# Altium PCB PCB1.PcbDoc
Units mm, origin at the board's own origin, x right, y up, seen from the top; angles counter-clockwise.
Board outline 152.4 x 101.6 mm, 2 copper layers (Top Layer, Bottom Layer); 41 components, 27 nets, 113 pads, 0 vias.
Unrouted connection lines stored in the file: 1.
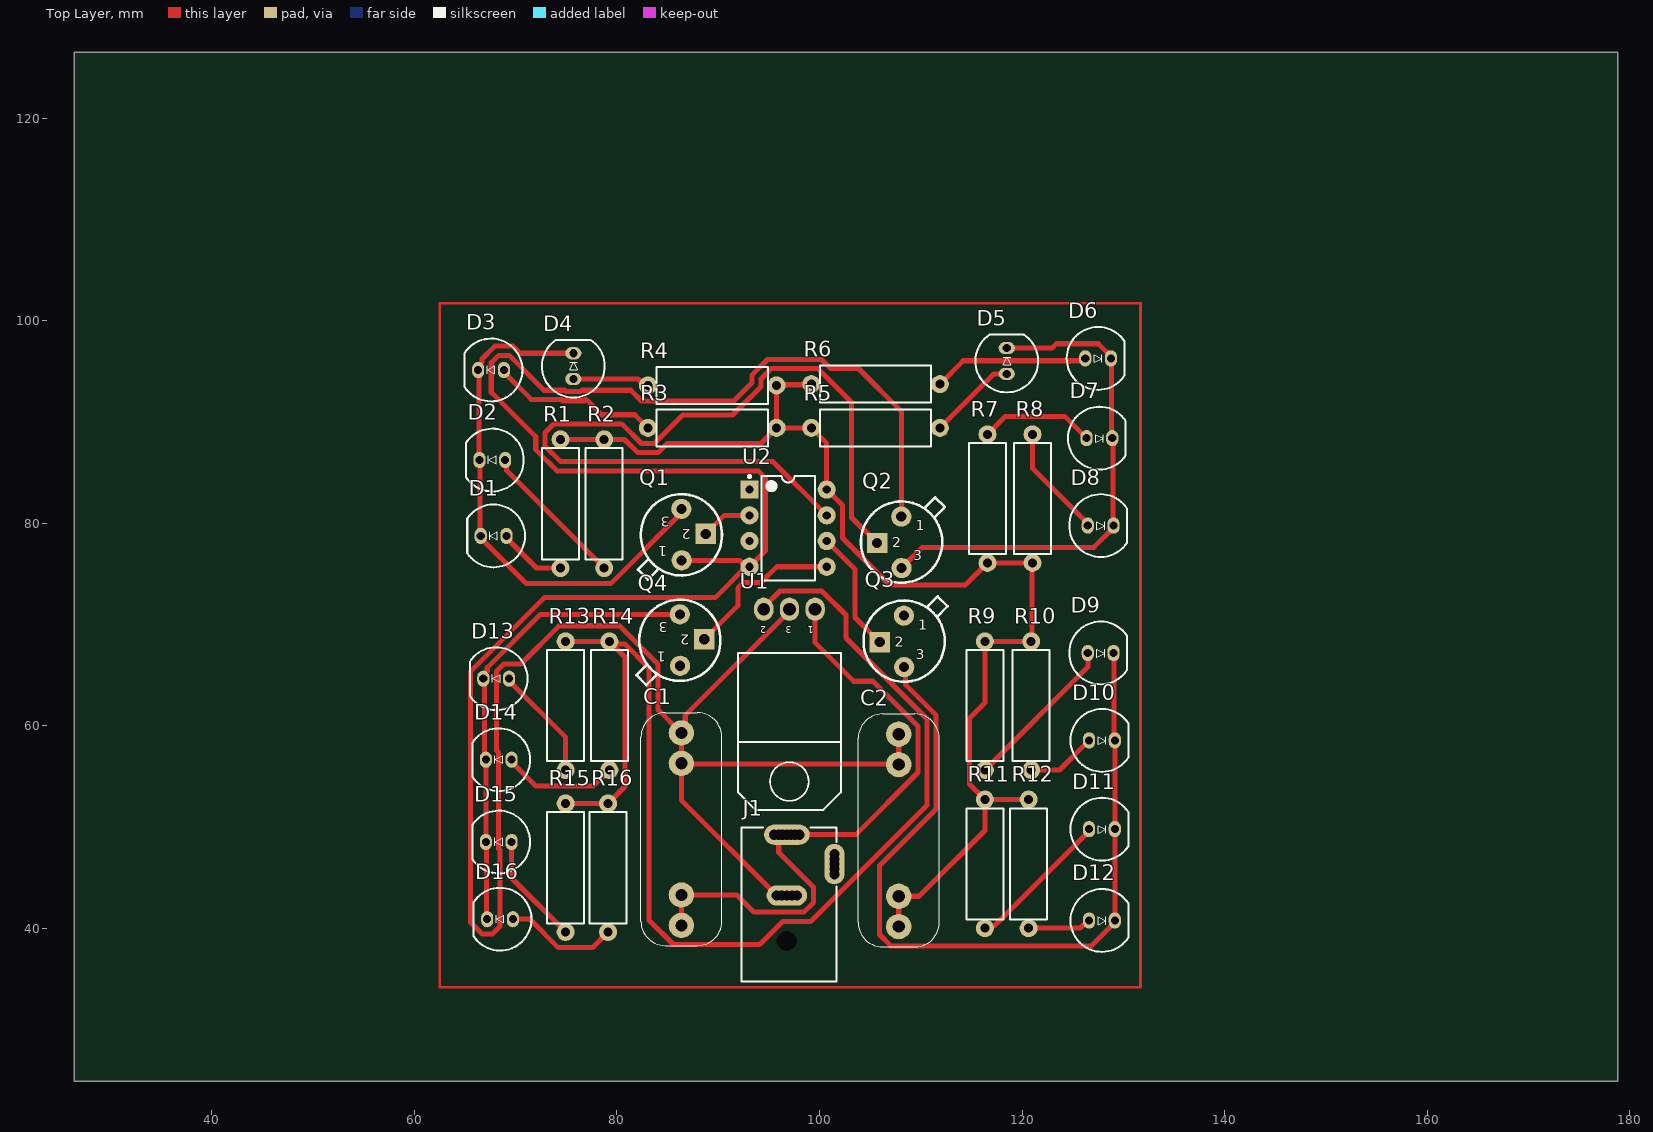
[diagram p0: Top Layer view]
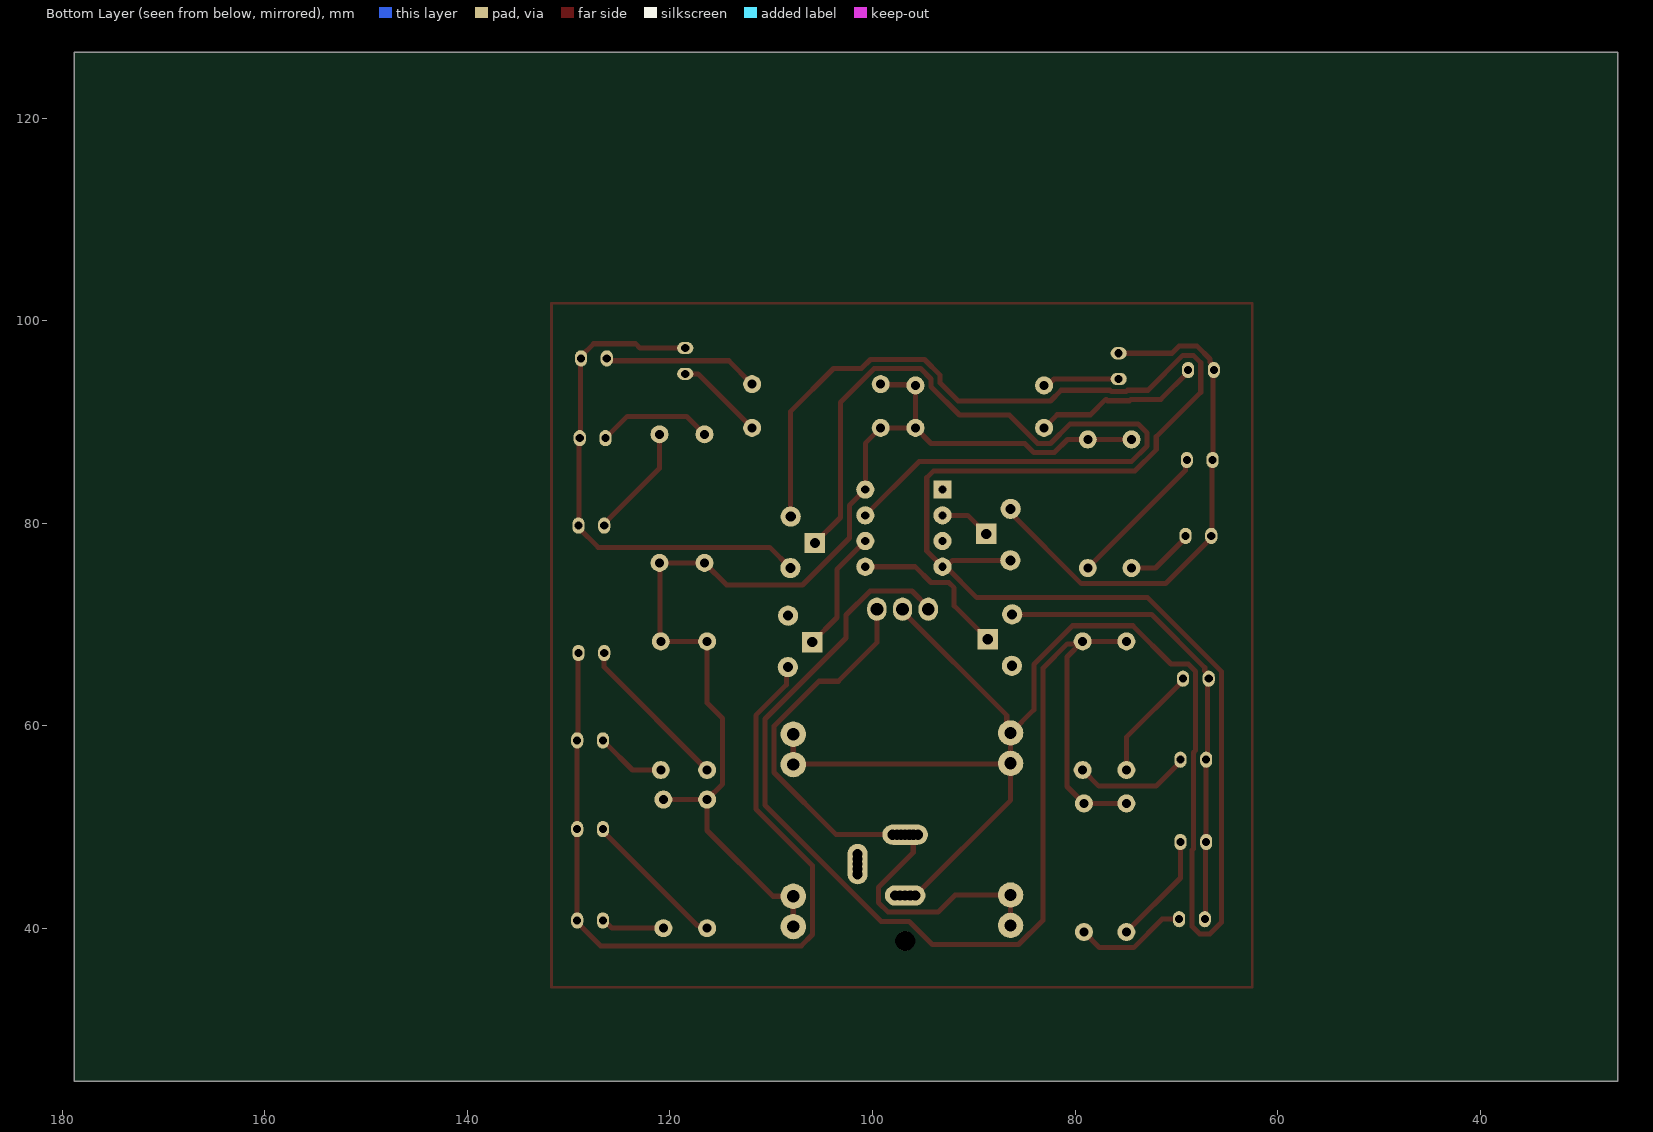
[diagram p1: Bottom Layer view, seen from below]
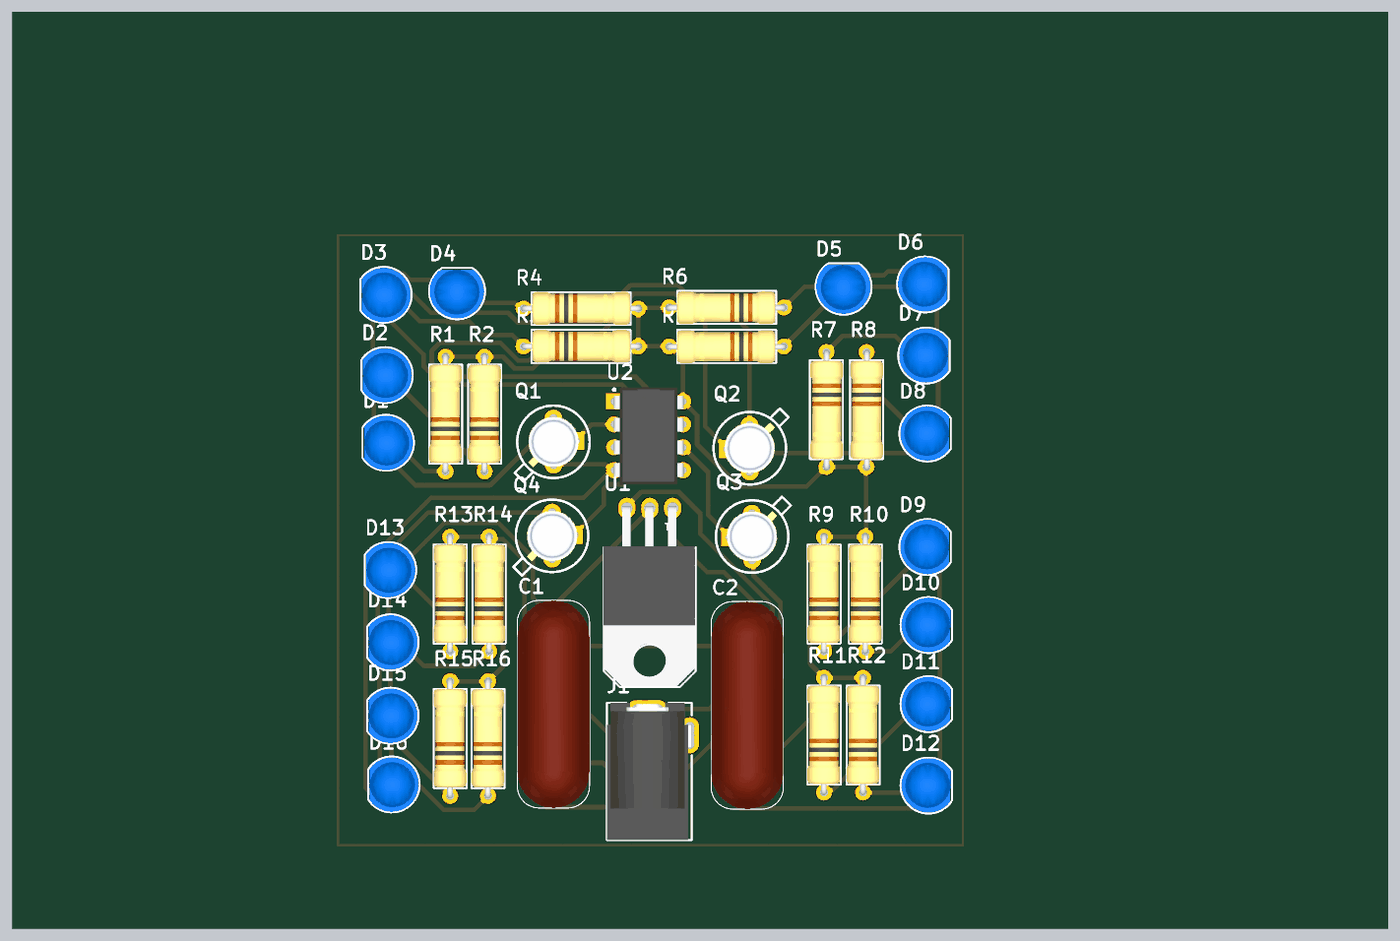
[diagram p2: 3D render of the assembled board from above, using the file's embedded part models]

## Layer stack, top to bottom
Top Solder: solder mask 0.0102, Solder Resist, Dk 3.5
Top Layer: signal copper 0.0356
Dielectric 1: dielectric 0.32, FR-4, Dk 4.8
Bottom Layer: signal copper 0.0356
Bottom Solder: solder mask 0.0102, Solder Resist, Dk 3.5

## Board outline
26.416,24.892 178.816,24.892 178.816,126.492 26.416,126.492

## Design rules (kind name [scope] priority, off if disabled: settings)
Clearance [All] p1: gap=0.4 ignorepadtopadclearanceinfootprint=FALSE
PolygonConnect [All] p1: connectstyle=Relief reliefconductorwidth=0.254 reliefentries=4 polygonreliefangle="90 Angle" airgapwidth=0.254
RoutingVias [All] p1: holewidth=0.711 width=1.27 viastyle="Through Hole" minholewidth=0.711 minwidth=1.27 maxholewidth=0.711 maxwidth=1.27
SolderMaskExpansion [All] p1: expansion=0.102 istentingtop=FALSE
SupplyNets "Schematic Supply Nets" [InNet('GND')] p1: voltage=0.000
Width [All] p1: maxlimit=1 minlimit=0.5 preferedwidth=0.7
30 further rules are at their usual default settings.

## Components (designator, comment, footprint, x,y, rotation, side; value= is the part's Value field where it differs from the comment)
C1 "" CBB22 86.36,49.784 r270 top
C2 "" CBB22 107.823,49.657 r270 top
D1 "LED 5MM" LED5MM_BLUE 67.818,78.74 r180 top
D2 "LED 5MM" LED5MM_BLUE 67.691,86.233 r180 top
D3 "LED 5MM" LED5MM_BLUE 67.564,95.123 r180 top
D4 "LED 5MM" LED5MM_BLUE 75.692,95.504 r90 top
D5 "LED 5MM" LED5MM_BLUE 118.491,96.012 r90 top
D6 "LED 5MM" LED5MM_BLUE 127.508,96.266 r0 top
D7 "LED 5MM" LED5MM_BLUE 127.635,88.392 r0 top
D8 "LED 5MM" LED5MM_BLUE 127.762,79.756 r0 top
D9 "LED 5MM" LED5MM_BLUE 127.762,67.183 r0 top
D10 "LED 5MM" LED5MM_BLUE 127.889,58.547 r0 top
D11 "LED 5MM" LED5MM_BLUE 127.889,49.784 r0 top
D12 "LED 5MM" LED5MM_BLUE 127.889,40.767 r0 top
D13 "LED 5MM" LED5MM_BLUE 68.072,64.643 r180 top
D14 "LED 5MM" LED5MM_BLUE 68.326,56.642 r180 top
D15 "LED 5MM" LED5MM_BLUE 68.326,48.514 r180 top
D16 "LED 5MM" LED5MM_BLUE 68.453,40.894 r180 top
J1 "Power Jack" "Power Jack" 96.774,34.735 r90 top
Q1 "2N2222" 2N2222 86.385,76.327 r180 top
Q2 "2N2222" 2N2222 108.077,80.645 r0 top
Q3 "2N2222" 2N2222 108.331,70.866 r0 top
Q4 "2N2222" 2N2222 86.233,65.913 r180 top
R1 "1K" RES-(1/1) 74.422,75.565 r90 top
R2 "1K" RES-(1/1) 78.74,75.565 r90 top
R3 "1K" RES-(1/1) 83.058,89.408 r0 top
R4 "1K" RES-(1/1) 83.058,93.599 r0 top
R5 "1K" RES-(1/1) 111.887,89.408 r180 top
R6 "1K" RES-(1/1) 111.887,93.726 r180 top
R7 "1K" RES-(1/1) 116.586,88.773 r270 top
R8 "1K" RES-(1/1) 121.031,88.773 r270 top
R9 "1K" RES-(1/1) 116.332,55.626 r90 top
R10 "1K" RES-(1/1) 120.904,55.626 r90 top
R11 "1K" RES-(1/1) 116.332,40.005 r90 top
R12 "1K" RES-(1/1) 120.65,40.005 r90 top
R13 "1K" RES-(1/1) 74.93,55.626 r90 top
R14 "1K" RES-(1/1) 79.248,55.626 r90 top
R15 "1K" RES-(1/1) 74.93,39.624 r90 top
R16 "1K" RES-(1/1) 79.121,39.624 r90 top
U1 "L78XXCV" "78XXCV - Right" 97.028,71.501 r180 top
U2 "ATtiny13-20PU" 8P3 96.901,79.502 r0 top

## Footprints (in the part's own frame and the unit in brackets; to place one, negate y for a bottom-side part, rotate by r counter-clockwise, add the part's x,y. Pads: shape width x height; smd on the part's side, far side on the other; paste and mask are expansions set on the pad)
2N2222 [mm] "NPN Transistor"
  round 2 hole 1: 1(0,0) 3(0.025,-5.08)
  rect 2x2 hole 1: 2(-2.388,-2.616)
  silkscreen extent -3.99,-6.53 4.31,1.89, body extent -2.79,-5.3 2.81,0.3, height 6.6
8P3 [mm] "DIP, 8-Leads, Row Spacing 7.62mm, Pitch 2.54mm, Body 9.59x6.61mm"
  rect 1.8x1.8 hole 0.8: 1(-3.81,3.81)
  round 1.8 hole 0.8: 2(-3.81,1.27) 3(-3.81,-1.27) 4(-3.81,-3.81) 5(3.81,-3.81) 6(3.81,-1.27) 7(3.81,1.27) 8(3.81,3.81)
  silkscreen extent -3.93,-5.15 2.65,5.23, body extent -3.88,-5.4 3.88,5.4, height 4.5
"78XXCV - Right" [mil] "Right Angle"
  oval 75x90 hole 50: 1(-100,0) 2(100,0) 3(0,0)
  silkscreen extent -201,170 200,780, body extent -198,-8 202,776, height 175
CBB22 [mm] "W23_0_H14_5_T8_0_P19"
  round 2.5 hole 1.2: 1(-9.5,0) 1(-6.5,0) 2(6.5,0) 2(9.5,0)
  silkscreen extent -11.5,-4 11.5,4, body extent -11.5,-4 11.5,4, height 19.5
LED5MM_BLUE [mm] "LED 5MM THROUGH HOLE BLUE-Designer Abbas Basereh"
  oval 1.2x1.6 hole 0.8: 1(-1.27,0) 2(1.27,0)
  silkscreen extent -3.1,-3.1 2.6,3.1, body extent -2.99,-2.98 2.43,3.04, height 12.31
"Power Jack" [mm] "Power Adaptor Jack"
  round 1.5 hole 1: 1(14.5,-1.25) 1(14.5,-0.8) 1(14.5,-0.4) 1(14.5,0.4) 1(14.5,0.8) 1(14.5,1.25) 2(8.5,-1) 2(8.5,1) 2(8.5,-0.5) 2(8.5,0.5) 3(10.6,-4.7) 3(11.1,-4.7) 3(12.1,-4.7) 3(12.6,-4.7)
  oval 2x4.5 hole 1: 1(14.5,0)
  oval 2x4 hole 1: 2(8.5,0)
  oval 4x2 hole 1: 3(11.6,-4.7)
  round 1.9 hole 2: MH(4,0)
  silkscreen extent 0,-4.9 15.2,4.5, body extent 0,-4.9 15.2,4.5, height 11
RES-(1/1) [mil]
  round 70 hole 35: 1(0,0) 2(500,0)
  silkscreen extent 34,-72 466,72, body extent -11,-71 514,73, height 151

## Part data
C1 C2: library part "Cap CBB22 105J400V", "Polypropylene film with epoxy Cap CBB22 105J400V", Manufacturer=CHINA, Data=16-12-2016, Designer="Abbas Basereh", Link=https://www.alibaba.com/product-detail/CBB22-capacitors-105J-400V-1UF-400V_60020643516.html, Part. No=105J400V
D1 D2 D3 D4 D5 D6 D7 D8 D9 D10 D11 D12 D13 D14 D15 D16: "Light Emitting Diode", Data=16-12-2016, Designer="Abbas Basereh"
Q1 Q2 Q3 Q4: "NPN Transistor"
R1 R2 R3 R4 R5 R6 R7 R8 R9 R10 R11 R12 R13 R14 R15 R16: library part "RES DIP PACKAGE", "TOTAL DIP RESISTOR PACK", Designer="Ali Hafizi"
U1: "Fixed Voltage Regulator", Adding Date=1387/01/06, Company=ControTec, Designer="Saeid Jorablo"
U2: "8-bit AVR Microcontroller, 2.7-5.5V, 1KB Flash, 64 Bytes EEPROM, 64 Bytes SRAM, 8-pin PDIP, Industrial Grade (-40°C to 85°C), Pb-Free", Supplier Part Number 1=ATTINY13-20PU-ND, Code_JEDEC=MS-001-BA, ComponentAvailability="Not recommended for new design.", ComponentLink1Description="Manufacturer Link", ComponentLink1URL=http://www.atmel.com/products/avr/default.asp?, ComponentLink2Description="ATtiny13  Datasheet", ComponentLink2URL=http://www.atmel.com/dyn/resources/prod_documents/doc2535.pdf, ComponentLink3Description="ATtiny13 Summary", ComponentLink3URL=http://www.atmel.com/dyn/resources/prod_documents/2535S.pdf, ComponentLink4Description="Atmel.com Home", ComponentLink4URL=http://www.atmel.com, DatasheetVersion="revI, May-2008", PackageDescription="8-Lead, 0.300\" Wide Body, Plastic Dual In-Line Package (PDIP)", PackageReference=8P3, PackageVersion="revB, Jan-2002", Published=2017-1-6, Publisher="Abbas Basereh", Supplier 1=Digi-Key, Supplier 2=Farnell, Supplier 3=Mouser, Supplier Part Number 2=9171550, Supplier Part Number 3=556-ATTINY13-20PU
J1: Adding Date=10/21/2009, Company=Personal, Designer="Saeid Jorablo", Project Name=Laser

## Nets (pads, with @x,y where several pads share a name; then routed paths per layer and width w, separated by ;. In a path a pad name is that pad's centre, name@x,y a point inside that pad or via, vN(x,y) a via of type N, cw(c..) or ccw(c..) an arc to the next point about the centre after c; other vN are vias at no path point)
GND: C1.1 C2.1 J1.2 Q1.1 Q2.1 U1.3 U2.4 | length 281.7
  Top Layer w0.5: Q1.1 92.104,76.327 92.739,75.692 U2.4 ; U2.4@92.741,75.692 89.692,72.643 72.829,72.643 65.552,65.366 65.552,40.557 66.665,39.444 67.701,39.444 68.433,40.176 68.433,47.709 68.306,47.836 68.306,57.36 68.092,57.574 68.092,65.361 68.824,66.093 70.521,66.093 74.293,69.865 80.255,69.865 84.069,66.05 84.069,61.575 C1.1@86.36,59.284 ; U2.4@92.915,75.692 U2.4 ; J1.2@95.774,43.235 86.36,52.649 C1.1@86.36,56.284 ; U1.3 97.028,71.31 86.743,61.025 86.743,59.667 C1.1@86.36,59.284 ; C2.1@107.823,59.157 107.823,56.157 107.759,56.22 86.423,56.22 C1.1@86.36,56.284 ; Q2.1 108.077,91.042 103.854,95.265 101.097,95.265 100.197,96.165 94.875,96.165 93.319,94.609 93.319,93.844 91.535,92.06 82.421,92.06 81.36,93.121 76.547,93.121 76.41,92.984 74.974,92.984 74.837,93.121 72.804,93.121 69.352,96.573 68.316,96.573 67.584,95.841 67.584,92.927 71.983,88.528 71.983,87.255 74.069,85.169 93.953,85.169 94.641,84.481 94.641,77.242 U2.4 ; C1.1@86.36,56.284 C1.1@86.36,59.284
NetC1_2: C1.2 J1.1 U1.1 | length 61.4
  Top Layer w0.5: C1.2@86.36,40.284 86.36,43.284 91.83,43.284 93.529,41.585 98.457,41.585 99.424,42.552 99.424,44.033 95.974,47.483 J1.1@95.974,49.235 ; J1.1@97.574,49.235 103.588,49.235 109.723,55.37 109.723,59.944 105.278,64.389 103.378,64.389 99.568,68.199 U1.1
NetC2_2: C2.2 R1.2 R2.2 R3.2 R4.2 R5.2 R6.2 R7.2 R8.2 R9.2 R10.2 R11.2 R12.2 R13.2 R14.2 R15.2 R16.2 U1.2 U2.8 | length 240.5
  Top Layer w0.5: R1.2 R2.2 80.752,88.265 82.048,86.969 84.068,86.969 84.968,87.869 94.219,87.869 R3.2 ; R15.2 R16.2 80.787,53.99 80.787,66.787 R14.2 ; R13.2 R14.2 ; U1.2 94.488,71.691 96.09,73.294 100.232,73.294 102.605,70.921 102.605,68.669 110.623,60.651 110.623,52.151 99.157,40.685 96.391,40.685 94.09,38.384 85.573,38.384 83.169,40.788 83.169,65.678 80.765,68.081 79.818,68.081 79.573,68.326 R14.2 ; R6.2 99.123,93.662 95.822,93.662 R4.2 R3.2 ; C2.2@107.823,40.157 107.823,43.157 109.832,43.157 116.332,49.657 R11.2 ; R12.2 R11.2 ; R3.2 R5.2 100.711,87.884 U2.8 102.261,81.762 102.261,78.538 106.911,73.888 114.401,73.888 R7.2 R8.2 120.968,76.01 120.968,68.389 R10.2 R9.2 116.332,62.254 114.793,60.715 114.793,54.244 R11.2
NetD1_1: D1.1 R1.1 | length 6.8
  Top Layer w0.5: D1.1 69.088,78.54 72.063,75.565 R1.1
NetD1_2: D1.2 D2.2 D3.2 D4.2 Q1.3 | length 52.7
  Top Layer w0.5: D4.2 70.424,96.774 69.725,97.473 67.943,97.473 66.684,96.214 66.684,95.902 66.294,95.512 D3.2 66.357,95.059 66.357,86.296 D2.2 66.484,86.169 66.484,78.803 D1.2 66.548,78.54 71.062,74.026 79.377,74.026 86.36,81.009 Q1.3
NetD2_1: D2.1 R2.1 | length 14.7
  Top Layer w0.5: D2.1 69.095,86.099 69.095,85.21 R2.1
NetD3_1: D3.1 R3.1 | length 16.8
  Top Layer w0.5: D3.1 68.834,94.923 71.536,92.221 74.465,92.221 74.601,92.084 76.783,92.084 76.919,92.221 76.961,92.221 78.477,90.704 81.762,90.704 R3.1
NetD4_1: D4.1 R4.1 | length 7.6
  Top Layer w0.5: D4.1 82.077,94.234 82.712,93.599 R4.1
NetD5_1: D5.1 R5.1 | length 8.8
  Top Layer w0.5: R5.1 117.221,94.742 D5.1
NetD5_2: D5.2 D6.2 D7.2 D8.2 Q2.3 | length 50.6
  Top Layer w0.5: Q2.3 110.149,77.612 127.088,77.612 129.032,79.556 D8.2 128.969,79.819 128.969,88.329 D7.2 128.841,88.456 128.841,96.203 D6.2 128.778,96.466 127.528,97.716 123.388,97.716 122.954,97.282 D5.2
NetD6_1: D6.1 R6.1 | length 15.4
  Top Layer w0.5: R6.1 114.193,96.032 126.004,96.032 D6.1
NetD7_1: D7.1 R7.1 | length 11.4
  Top Layer w0.5: R7.1 118.364,90.551 124.206,90.551 126.031,88.726 126.042,88.726 126.365,88.403 D7.1
NetD8_1: D8.1 R8.1 | length 11.3
  Top Layer w0.5: R8.1 121.031,85.417 126.492,79.956 D8.1
NetD9_1: D9.1 R9.1 | length 15.8
  Top Layer w0.5: R9.1 126.492,65.786 D9.1
NetD9_2: D9.2 D10.2 D11.2 D12.2 Q3.3 | length 81.6
  Top Layer w0.5: Q3.3 108.511,65.632 108.511,64.036 111.523,61.024 111.523,51.778 105.923,46.178 105.923,39.37 107.036,38.257 126.849,38.257 129.159,40.567 D12.2 D11.2 D10.2 129.096,58.61 129.096,67.12 D9.2 D9.2@129.032,66.983
NetD10_1: D10.1 R10.1 | length 6.9
  Top Layer w0.5: R10.1 123.698,55.626 126.285,58.213 126.296,58.213 126.619,58.536 D10.1
NetD11_1: D11.1 R11.1 | length 14.5
  Top Layer w0.5: R11.1 116.577,40.25 117.285,40.25 126.492,49.457 126.492,49.784 D11.1
NetD12_1: D12.1 R12.1 | length 6.4
  Top Layer w0.5: R12.1 125.73,40.005 126.158,40.433 126.296,40.433 126.619,40.756 D12.1@126.619,40.894
NetD13_1: D13.1 R13.1 | length 11.3
  Top Layer w0.5: D13.1 69.342,64.443 74.93,58.855 R13.1
NetD13_2: D13.2 D14.2 D15.2 D16.2 Q4.3 | length 46.4
  Top Layer w0.5: D16.2 67.119,40.957 67.119,48.45 D15.2 D14.2 66.929,56.769 66.929,64.516 D13.2 66.802,65.032 67.192,65.422 67.192,65.734 72.451,70.993 Q4.3
NetD14_1: D14.1 R14.1 | length 11.5
  Top Layer w0.5: D14.1 69.596,56.442 72.009,54.029 77.651,54.029 R14.1
NetD15_1: D15.1 R15.1 | length 11.1
  Top Layer w0.5: D15.1 69.596,44.958 R15.1
NetD16_1: D16.1 R16.1 | length 11.2
  Top Layer w0.5: D16.1 71.402,40.894 74.211,38.085 77.582,38.085 R16.1
NetQ1_2: Q1.2 U2.2 | length 5.1
  Top Layer w0.5: Q1.2 90.602,80.772 U2.2
NetQ2_2: Q2.2 U2.7 | length 83.2
  Top Layer w0.5: U2.7 95.414,86.069 74.442,86.069 72.883,87.628 72.883,88.902 73.785,89.804 80.486,89.804 82.421,87.869 83.695,87.869 86.497,90.67 91.418,90.67 94.219,93.472 94.219,94.236 95.248,95.265 99.824,95.265 103.161,91.928 103.161,80.557 Q2.2
NetQ3_2: Q3.2 U2.6 | length 12.1
  Top Layer w0.5: U2.6 103.505,75.438 103.505,70.688 Q3.2
NetQ4_2: Q4.2 U2.5 | length 16.1
  Top Layer w0.5: Q4.2 91.937,71.846 91.937,73.615 92.464,74.142 94.233,74.142 95.783,75.692 U2.5
pads on no net: J1.3 J1.MH Q3.1 Q4.1 U2.1 U2.3
copper on no net: | length 273.6
  Top Layer w0.254: 62.484,34.163 131.699,34.163 131.699,101.727 62.484,101.727 62.484,34.163

## Text inside footprints (layer, text, board x,y; h text height)
Q1: Top Overlay "1" at 84.963,77.699 h1 r180; Top Overlay "2" at 87.3,79.375 h1 r180; Top Overlay "3" at 85.192,80.645 h1 r180
Q2: Top Overlay "1" at 109.499,79.273 h1; Top Overlay "2" at 107.163,77.597 h1; Top Overlay "3" at 109.271,76.327 h1
Q3: Top Overlay "1" at 109.753,69.494 h1; Top Overlay "2" at 107.417,67.818 h1; Top Overlay "3" at 109.525,66.548 h1
Q4: Top Overlay "1" at 84.811,67.285 h1 r180; Top Overlay "2" at 87.147,68.961 h1 r180; Top Overlay "3" at 85.039,70.231 h1 r180
U1: Top Overlay "1" at 99.441,69.801 h0.7 r180; Top Overlay "2" at 94.717,69.801 h0.7 r180; Top Overlay "3" at 97.282,69.801 h0.7 r180